# Altium PCB ATMEGA8高仿PLC控制板.PCBDOC (part 2 of 3)
Units mm, origin at the board's own origin, x right, y up, seen from the top; angles counter-clockwise.
Board outline 152.4 x 101.6 mm, 2 copper layers (Top Layer, Bottom Layer); 72 components, 81 nets, 279 pads, 77 vias.
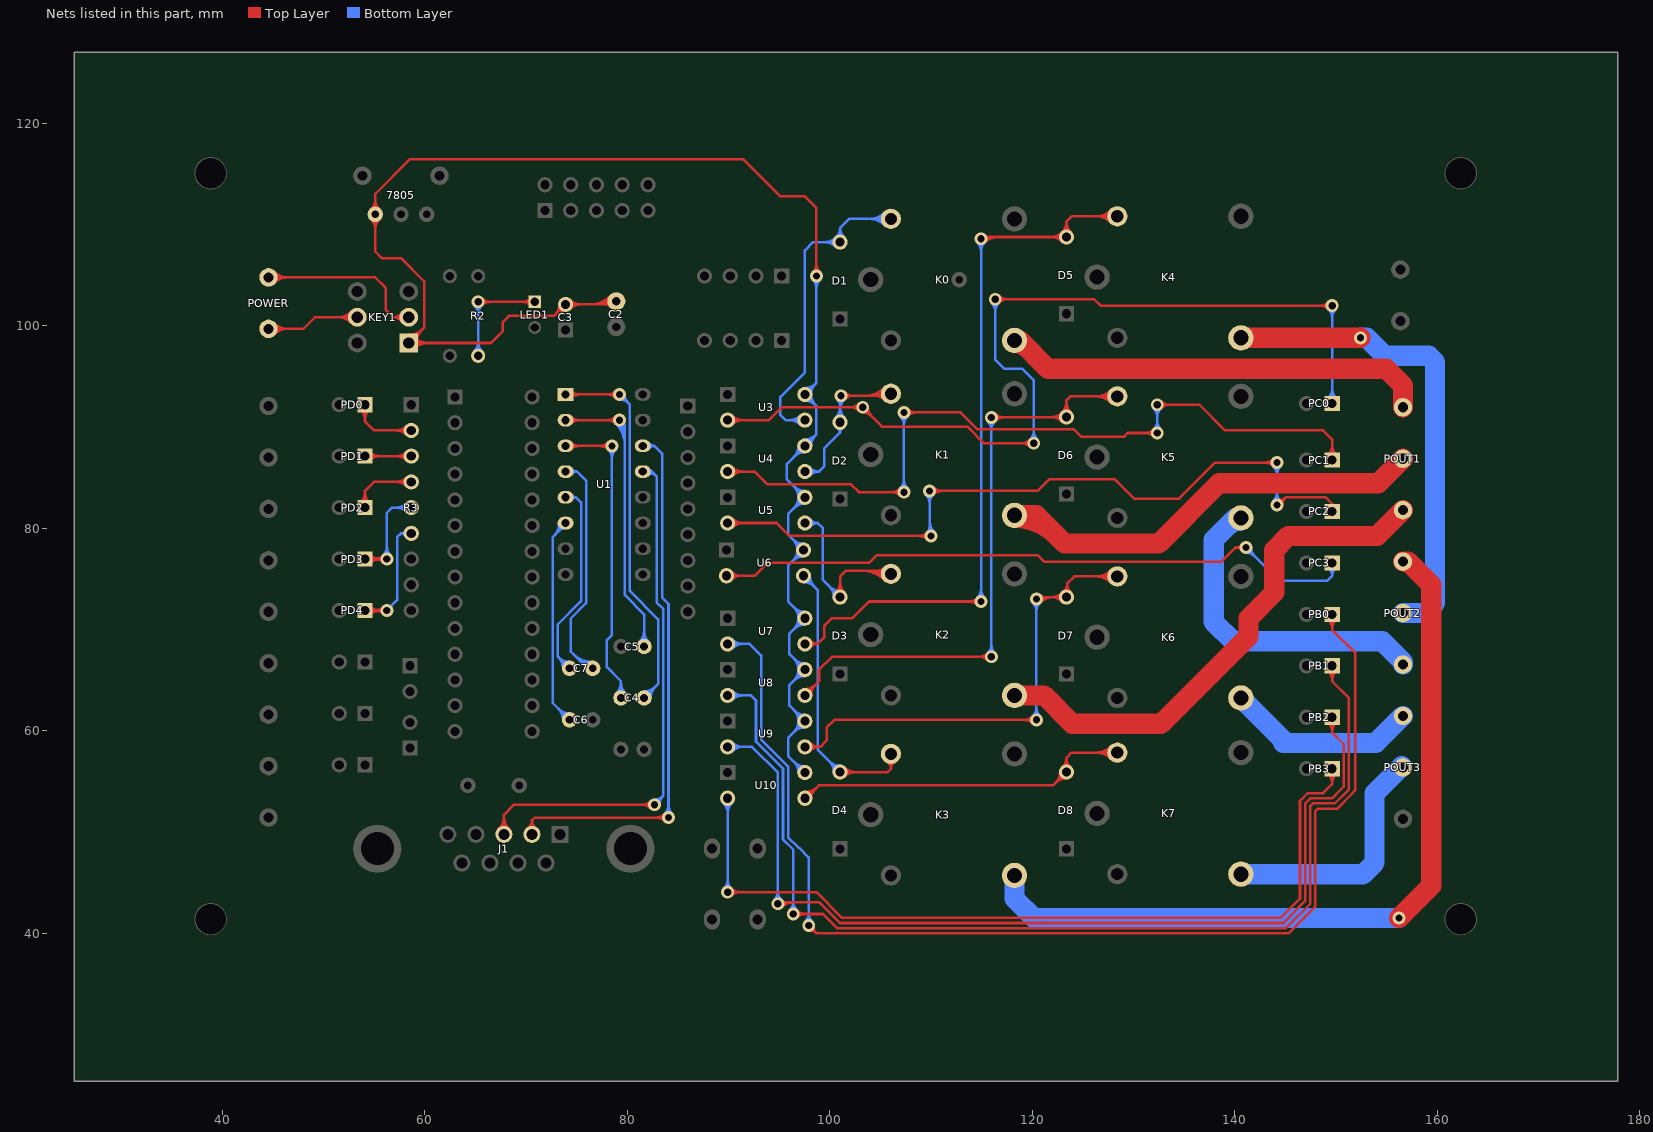
[diagram p2: the nets of this part, all layers, seen from the top]

## Via types
v1: diameter 1.27, hole 0.711, Top Layer to Bottom Layer, 77 vias

## Nets (pads, with @x,y where several pads share a name; then routed paths per layer and width w, separated by ;. In a path a pad name is that pad's centre, name@x,y a point inside that pad or via, vN(x,y) a via of type N, cw(c..) or ccw(c..) an arc to the next point about the centre after c; other vN are vias at no path point) (continued)
Net7805_1: 7805.1 C2.1 C3.2 KEY1.3 U3.4 U4.4 U5.4 U6.4 U7.4 U8.4 U9.4 U10.4 | length 246
  Top Layer w0.254: 7805.1@54.669,110.549 cw(c53.585,109.465) 55.118,109.465 cw(c56.651,109.465) 7805.1@55.567,110.549 ; 7805.1@54.669,111.447 ccw(c53.585,112.531) 55.118,112.531 ccw(c56.651,112.531) 7805.1@55.567,111.447 ; 7805.1@54.849,110.729 cw(c54.198,110.078) 55.118,110.078 cw(c56.038,110.078) 7805.1@55.387,110.729 ; 7805.1@54.849,111.267 ccw(c54.198,111.918) 55.118,111.918 ccw(c56.038,111.918) 7805.1@55.387,111.267 ; KEY1.3@58.42,98.842 ccw(c58.42,100.155) 59.349,99.227 ccw(c60.277,98.298) KEY1.3@58.964,98.298 ; KEY1.3@58.42,99.096 ccw(c58.42,101.023) 59.782,99.66 ccw(c61.145,98.298) KEY1.3@59.218,98.298 ; KEY1.3@58.805,97.913 cw(c59.733,96.985) 59.733,98.298 cw(c59.733,99.611) KEY1.3@58.805,98.683 ; KEY1.3@58.984,97.734 cw(c60.347,96.371) 60.347,98.298 cw(c60.347,100.225) KEY1.3@58.984,98.862 ; C3.2@73.291,102.108 cw(c71.787,102.108) 72.85,101.044 cw(c73.914,99.981) C3.2@73.914,101.485 ; C3.2@73.545,102.108 cw(c72.654,102.108) 73.284,101.478 cw(c73.914,100.848) C3.2@73.914,101.739 ; C3.2@74.175,101.847 cw(c74.805,101.217) 74.805,102.108 cw(c74.805,102.999) C3.2@74.175,102.369 ; C3.2@74.355,101.667 cw(c75.418,100.604) 75.418,102.108 cw(c75.418,103.612) C3.2@74.355,102.549 ; 76.316,102.108 ccw(c76.316,105.015) C2.1@78.371,102.959 ; 76.929,102.108 ccw(c76.929,104.402) C2.1@78.551,102.78 ; 77.542,102.108 ccw(c77.542,103.788) C2.1@78.73,102.6 ; 77.787,102.108 cw(c77.787,101.282) C2.1@78.371,101.866 ; C2.1@78.918,102.413 78.613,102.108 C3.2@73.914,102.108 72.771,100.965 68.326,100.965 67.691,100.33 67.691,99.441 66.548,98.298 KEY1.3@58.42,98.298 59.944,99.822 59.944,104.394 57.658,106.68 55.753,106.68 55.118,107.315 55.118,113.03 58.547,116.459 91.44,116.459 95.123,112.776 97.536,112.776 98.679,111.633 v1(98.679,104.902) ; v1@98.32,105.261 ccw(c97.453,106.128) 98.679,106.128 ccw(c99.905,106.128) v1@99.038,105.261
  Bottom Layer w0.254: U7.4@96.901,71.12 U7.4@97.536,71.12 ; U10.4@96.913,55.88 ccw(c95.409,55.88) 96.472,56.944 ccw(c97.536,58.007) U10.4@97.536,56.503 ; U4.4@96.913,88.138 cw(c95.409,88.138) 96.472,87.074 cw(c97.536,86.011) U4.4@97.536,87.515 ; U10.4@97.167,55.88 ccw(c96.276,55.88) 96.906,56.51 ccw(c97.536,57.14) U10.4@97.536,56.249 ; U4.4@97.167,88.138 cw(c96.276,88.138) 96.906,87.508 cw(c97.536,86.878) U4.4@97.536,87.769 ; U5.4@97.238,83.058 U5.4@97.536,83.058 ; U6.4@97.409,77.228 ccw(c97.409,75.724) 96.345,76.787 ccw(c95.282,77.851) 96.786,77.851 ccw(c95.282,77.851) 96.345,78.915 ccw(c97.409,79.978) U6.4@97.409,78.474 ; U6.4@97.409,77.482 ccw(c97.409,76.591) 96.779,77.221 ccw(c96.149,77.851) 97.04,77.851 ccw(c96.149,77.851) 96.779,78.481 ccw(c97.409,79.111) U6.4@97.409,78.22 ; U10.4@97.536,55.88 95.885,57.531 95.885,59.309 U9.4@97.536,60.96 96.012,62.484 96.012,64.516 U8.4@97.536,66.04 96.012,67.564 96.012,69.596 U7.4@97.536,71.12 ; U9.4@97.536,60.337 ccw(c97.536,58.833) 96.472,59.896 ccw(c95.409,60.96) 96.913,60.96 ccw(c95.409,60.96) 96.472,62.024 ccw(c97.536,63.087) U9.4@97.536,61.583 ; U9.4@97.536,60.591 ccw(c97.536,59.7) 96.906,60.33 ccw(c96.276,60.96) 97.167,60.96 ccw(c96.276,60.96) 96.906,61.59 ccw(c97.536,62.22) U9.4@97.536,61.329 ; U8.4@97.536,65.417 ccw(c97.536,63.913) 96.472,64.976 ccw(c95.409,66.04) 96.913,66.04 ccw(c95.409,66.04) 96.472,67.104 ccw(c97.536,68.167) U8.4@97.536,66.663 ; U8.4@97.536,65.671 ccw(c97.536,64.78) 96.906,65.41 ccw(c96.276,66.04) 97.167,66.04 ccw(c96.276,66.04) 96.906,66.67 ccw(c97.536,67.3) U8.4@97.536,66.409 ; U7.4@97.536,70.497 ccw(c97.536,68.993) 96.472,70.056 ccw(c95.409,71.12) 96.913,71.12 ccw(c95.409,71.12) 96.472,72.184 ccw(c97.536,73.247) U7.4@97.536,71.743 ; U7.4@97.536,70.751 ccw(c97.536,69.86) 96.906,70.49 ccw(c96.276,71.12) 97.167,71.12 ccw(c96.276,71.12) 96.906,71.75 ccw(c97.536,72.38) U7.4@97.536,71.489 ; U5.4@97.536,82.435 ccw(c97.536,80.931) 96.472,81.994 ccw(c95.409,83.058) 96.913,83.058 ccw(c95.409,83.058) 96.472,84.122 ccw(c97.536,85.185) U5.4@97.536,83.681 ; U5.4@97.536,82.689 ccw(c97.536,81.798) 96.906,82.428 ccw(c96.276,83.058) 97.167,83.058 ccw(c96.276,83.058) 96.906,83.688 ccw(c97.536,84.318) U5.4@97.536,83.427 ; U4.4@97.536,88.507 ccw(c97.536,89.398) 98.166,88.768 ccw(c98.796,88.138) U4.4@97.905,88.138 ; U4.4@97.536,88.761 ccw(c97.536,90.265) 98.6,89.202 ccw(c99.663,88.138) U4.4@98.159,88.138 ; U3.4@97.536,92.595 cw(c97.536,91.091) 98.6,92.154 cw(c99.663,93.218) 98.159,93.218 cw(c99.663,93.218) 98.6,94.282 cw(c97.536,95.345) U3.4@97.536,93.841 ; U3.4@97.536,92.849 cw(c97.536,91.958) 98.166,92.588 cw(c98.796,93.218) 97.905,93.218 cw(c98.796,93.218) 98.166,93.848 cw(c97.536,94.478) U3.4@97.536,93.587 ; v1@98.32,104.543 cw(c97.453,103.676) 98.679,103.676 cw(c99.905,103.676) v1@99.038,104.543 ; v1(98.679,104.902) 98.679,94.361 U3.4@97.536,93.218 98.679,92.075 98.679,89.281 95.758,86.36 95.758,84.836 U5.4@97.536,83.058 ; U7.4@97.536,71.12 95.885,72.771 95.885,76.327 U6.4@97.409,77.851 95.885,79.375 95.885,81.407 U5.4@97.536,83.058
NetC4_1: C4.1 U1.1 | length 47.1
  Top Layer w0.254: U1.1@73.91,93.217 v1(79.249,93.217) ; U1.1@74.425,92.865 cw(c75.275,92.015) 75.275,93.217 cw(c75.275,94.419) U1.1@74.425,93.569 ; v1@78.89,92.858 ccw(c78.023,91.991) 78.023,93.217 ccw(c78.023,94.443) v1@78.89,93.576
  Bottom Layer w0.254: v1@79.249,92.709 cw(c79.249,91.483) 80.116,92.35 cw(c80.983,93.217) v1@79.757,93.217 ; v1(79.249,93.217) 80.264,92.202 80.264,73.787 83.058,70.993 83.058,64.643 C4.1@81.661,63.246 ; C4.1@81.661,63.627 ccw(c81.661,64.547) 82.311,63.896 ccw(c82.962,63.246) C4.1@82.042,63.246 ; C4.1@81.661,63.881 ccw(c81.661,65.414) 82.745,64.33 ccw(c83.829,63.246) C4.1@82.296,63.246
NetC4_2: C4.2 U1.3 | length 39.8
  Top Layer w0.254: U1.3@73.91,88.137 v1(78.485,88.137) ; U1.3@74.425,87.785 cw(c75.275,86.935) 75.275,88.137 cw(c75.275,89.339) U1.3@74.425,88.489 ; v1@78.126,87.778 ccw(c77.259,86.911) 77.259,88.137 ccw(c77.259,89.363) v1@78.126,88.496
  Bottom Layer w0.254: v1@78.126,87.778 cw(c77.256,86.908) 78.486,86.908 ; v1(78.485,88.137) 78.486,88.136 78.486,69.469 77.978,68.961 77.978,66.294 79.375,64.897 C4.2@79.375,63.246 ; 78.486,86.913 cw(c79.709,86.913) v1@78.844,87.778 ; C4.2@78.926,63.695 ccw(c77.842,64.779) 79.375,64.779 ccw(c80.908,64.779) C4.2@79.824,63.695 ; C4.2@79.106,63.515 ccw(c78.455,64.166) 79.375,64.166 ccw(c80.295,64.166) C4.2@79.644,63.515
NetC5_1: C5.1 U1.2 | length 43.4
  Top Layer w0.254: U1.2@73.91,90.677 v1(79.247,90.677) ; U1.2@74.425,90.325 cw(c75.275,89.475) 75.275,90.677 cw(c75.275,91.879) U1.2@74.425,91.029 ; v1@78.888,90.318 ccw(c78.021,89.451) 78.021,90.677 ccw(c78.021,91.903) v1@78.888,91.036
  Bottom Layer w0.254: v1@78.888,90.318 cw(c76.792,88.222) 79.756,88.222 ; v1@79.067,90.497 cw(c77.405,88.835) 79.756,88.835 ; v1@79.427,90.857 cw(c78.631,90.061) 79.756,90.061 ; v1@79.465,90.218 cw(c79.575,89.987) 79.756,90.168 ; v1@79.706,90.459 ccw(c79.937,90.349) 79.756,90.168 ; 79.756,89.448 ccw(c78.018,89.448) v1(79.247,90.677) 79.756,90.168 ; C5.1@81.212,68.775 ccw(c80.128,69.859) 81.661,69.859 ccw(c83.194,69.859) C5.1@82.11,68.775 ; C5.1@81.392,68.595 ccw(c80.741,69.246) 81.661,69.246 ccw(c82.581,69.246) C5.1@81.93,68.595 ; C5.1@81.661,68.326 81.661,71.501 79.756,73.406 79.756,90.168
NetC6_2: C6.2 U1.6 | length 27.3
  Bottom Layer w0.254: 72.791,79.266 ccw(c71.674,80.384) U1.6@73.251,80.485 ; 73.188,79.663 ccw(c72.42,80.432) U1.6@73.504,80.501 ; 73.4,79.875 cw(c73.748,79.527) U1.6@73.748,80.019 ; C6.2@73.66,61.087 ccw(c72.127,61.087) 73.211,62.171 ccw(c74.295,63.255) C6.2@74.295,61.722 ; U1.6@73.91,80.517 74.042,80.517 72.644,79.119 72.644,62.738 C6.2@74.295,61.087 ; C6.2@73.914,61.087 ccw(c72.994,61.087) 73.645,61.737 ccw(c74.295,62.388) C6.2@74.295,61.468
NetC7_1: C7.1 U1.4 | length 29
  Bottom Layer w0.254: U1.4@73.91,85.597 75.058,85.597 ; U1.4@74.474,85.302 cw(c75.058,84.871) 75.058,85.597 ; U1.4@74.474,85.892 ccw(c75.058,86.323) 75.058,85.597 ; 74.676,67.564 ccw(c76.517,69.405) C7.1@76.568,66.802 ; 75.098,67.142 ccw(c76.533,68.578) C7.1@76.573,66.548 ; 75.52,66.72 ccw(c76.55,67.75) C7.1@76.578,66.294 ; C7.1@76.581,66.167 76.073,66.167 74.422,67.818 74.422,71.076 75.946,72.6 75.946,84.709 75.058,85.597
NetC7_2: C7.2 U1.5 | length 24.4
  Bottom Layer w0.254: C7.2@73.66,66.167 ccw(c72.127,66.167) 73.211,67.251 ccw(c74.295,68.335) C7.2@74.295,66.802 ; U1.5@73.91,83.057 74.931,83.057 ; C7.2@73.914,66.167 ccw(c72.994,66.167) 73.645,66.817 ccw(c74.295,67.468) C7.2@74.295,66.548 ; C7.2@74.295,66.167 73.152,67.31 73.152,70.525 75.438,72.811 75.438,82.55 74.931,83.057 ; U1.5@74.505,82.81 cw(c74.931,82.566) 74.931,83.057 ; U1.5@74.505,83.304 ccw(c74.931,83.548) 74.931,83.057
NetD1_2: D1.2 K0.4 U3.3 | length 47
  Bottom Layer w0.254: U3.3@97.095,90.237 ccw(c96.032,89.174) 96.032,90.678 ccw(c96.032,92.182) U3.3@97.095,91.119 ; U3.3@97.275,90.417 ccw(c96.645,89.787) 96.645,90.678 ccw(c96.645,91.569) U3.3@97.275,90.939 ; U3.3@97.536,90.678 95.631,90.678 95.123,91.186 95.123,92.964 97.536,95.377 97.536,107.442 98.346,108.252 D1.2@101.016,108.252 101.016,109.652 ; D1.2@100.576,107.812 ccw(c99.512,106.748) 99.512,108.252 ccw(c99.512,109.756) D1.2@100.576,108.693 ; D1.2@100.599,108.715 ccw(c99.755,109.652) 101.016,109.652 ; D1.2@100.755,107.991 ccw(c100.125,107.361) 100.125,108.252 ccw(c100.125,109.143) D1.2@100.755,108.513 ; D1.2@100.769,108.526 ccw(c100.269,109.081) 101.016,109.081 ccw(c101.764,109.081) D1.2@101.263,108.526 ; D1.2@101.433,108.715 cw(c102.278,109.652) 101.016,109.652 ; K0.4@105.42,109.935 ccw(c103.929,108.444) 103.929,110.552 ccw(c103.929,112.66) K0.4@105.42,111.169 ; K0.4@105.599,110.114 ccw(c104.543,109.058) 104.543,110.552 ccw(c104.543,112.046) K0.4@105.599,110.99 ; K0.4@106.037,110.552 101.916,110.552 101.016,109.652
NetD2_2: D2.2 K1.4 U4.3 | length 34.4
  Top Layer w0.254: v1(101.092,93.091) 105.848,93.091 K1.4@106.037,93.28 ; v1@101.451,92.732 cw(c102.318,91.865) 102.318,93.091 cw(c102.318,94.317) v1@101.451,93.45 ; 103.473,93.091 ccw(c103.473,95.844) K1.4@105.42,93.897 ; 104.086,93.091 ccw(c104.086,95.231) K1.4@105.599,93.718 ; 104.386,93.091 cw(c104.386,91.629) K1.4@105.42,92.663 ; 104.7,93.091 ccw(c104.7,94.617) K1.4@105.779,93.538 ; 104.999,93.091 cw(c104.999,92.242) K1.4@105.599,92.842
  Bottom Layer w0.254: U4.3@97.536,85.598 98.933,85.598 ; U4.3@97.811,85.351 cw(c98.363,84.855) 98.363,85.598 cw(c98.363,86.341) U4.3@97.811,85.845 ; U4.3@98,85.182 cw(c98.933,84.343) 98.933,85.598 ; U4.3@98,86.014 ccw(c98.933,86.853) 98.933,85.598 ; D2.2@100.576,90.913 ccw(c99.512,91.976) 101.016,91.976 ccw(c102.52,91.976) D2.2@101.457,90.913 ; v1@100.733,92.732 cw(c100.048,92.047) 101.016,92.047 ; D2.2@100.735,89.916 cw(c100.504,89.459) 101.016,89.459 ; D2.2@100.755,90.733 ccw(c100.125,91.363) 101.016,91.363 ccw(c101.907,91.363) D2.2@101.277,90.733 ; 101.016,91.682 cw(c102.501,91.682) v1@101.451,92.732 ; 101.016,92.295 cw(c101.888,92.295) v1@101.272,92.911 ; v1(101.092,93.091) 101.016,93.015 101.016,89.459 ; D2.2@101.297,89.916 ccw(c101.528,89.459) 101.016,89.459 ; 98.933,85.598 99.441,86.106 99.441,87.884 101.016,89.459
NetD3_2: D3.2 K2.4 U5.3 | length 35.3
  Top Layer w0.254: D3.2@100.576,73.641 ccw(c99.512,74.704) 101.016,74.704 ccw(c102.52,74.704) D3.2@101.457,73.641 ; D3.2@100.755,73.461 ccw(c100.125,74.091) 101.016,74.091 ccw(c101.907,74.091) D3.2@101.277,73.461 ; D3.2@101.016,73.2 101.016,75.235 101.6,75.819 105.718,75.819 K2.4@106.037,75.5 ; 103.159,75.819 cw(c103.159,72.622) K2.4@105.42,74.883 ; 103.772,75.819 cw(c103.772,73.235) K2.4@105.599,75.062 ; 104.386,75.819 cw(c104.386,73.849) K2.4@105.779,75.242 ; 104.7,75.819 ccw(c104.7,76.837) K2.4@105.42,76.117 ; 104.999,75.819 cw(c104.999,74.462) K2.4@105.959,75.421
  Bottom Layer w0.254: U5.3@97.536,80.518 98.806,80.518 ; U5.3@97.828,80.292 cw(c98.288,79.936) 98.288,80.518 cw(c98.288,81.1) U5.3@97.828,80.744 ; U5.3@98.029,80.137 cw(c98.806,79.535) 98.806,80.518 ; U5.3@98.029,80.899 ccw(c98.806,81.501) 98.806,80.518 ; D3.2@100.393,73.2 ccw(c98.889,73.2) 99.953,74.264 ccw(c101.016,75.327) D3.2@101.016,73.823 ; D3.2@100.647,73.2 ccw(c99.756,73.2) 100.386,73.83 ccw(c101.016,74.46) D3.2@101.016,73.569 ; D3.2@101.016,73.2 99.314,74.903 99.314,80.01 98.806,80.518
NetD4_2: D4.2 K3.4 U6.3 | length 41.7
  Top Layer w0.254: D4.2@101.016,55.928 105.712,55.928 106.037,56.253 ; D4.2@101.277,55.667 cw(c101.907,55.037) 101.907,55.928 cw(c101.907,56.819) D4.2@101.277,56.189 ; D4.2@101.457,55.488 cw(c102.52,54.424) 102.52,55.928 cw(c102.52,57.432) D4.2@101.457,56.369 ; K3.4@105.621,56.953 cw(c105.241,56.253) 106.037,56.253 ; K3.4@105.742,57.176 cw(c105.473,56.68) 106.037,56.68 cw(c106.601,56.68) K3.4@106.332,57.176 ; K3.4@106.037,57.72 106.037,56.253 ; K3.4@106.453,56.953 ccw(c106.833,56.253) 106.037,56.253
  Bottom Layer w0.254: U6.3@97.409,74.688 cw(c97.409,73.184) 98.473,74.247 cw(c99.536,75.311) U6.3@98.032,75.311 ; U6.3@97.409,74.942 cw(c97.409,74.051) 98.039,74.681 cw(c98.669,75.311) U6.3@97.778,75.311 ; U6.3@97.409,75.311 98.806,73.914 98.806,58.139 D4.2@101.016,55.928 ; D4.2@100.393,55.928 ccw(c98.889,55.928) 99.953,56.992 ccw(c101.016,58.055) D4.2@101.016,56.551 ; D4.2@100.647,55.928 ccw(c99.756,55.928) 100.386,56.558 ccw(c101.016,57.188) D4.2@101.016,56.297
NetD5_2: D5.2 K4.4 U7.3 | length 95.6
  Top Layer w0.254: U7.3@97.536,68.58 98.806,68.58 ; U7.3@97.828,68.354 cw(c98.288,67.998) 98.288,68.58 cw(c98.288,69.162) U7.3@97.828,68.806 ; U7.3@98.029,68.199 cw(c98.806,67.597) 98.806,68.58 ; U7.3@98.029,68.961 ccw(c98.806,69.563) 98.806,68.58 ; v1@114.576,72.412 ccw(c113.709,71.545) 113.709,72.771 ccw(c113.709,73.997) v1@114.576,73.13 ; v1(114.935,72.771) 103.886,72.771 102.235,71.12 100.203,71.12 99.441,70.358 99.441,69.215 98.806,68.58 ; v1(114.935,108.585) 115.11,108.76 D5.2@123.368,108.76 123.368,110.287 123.887,110.806 K4.4@128.389,110.806 ; v1@115.115,108.405 cw(c115.971,107.549) 115.971,108.76 ; v1@115.294,108.226 cw(c116.584,106.936) 116.584,108.76 ; v1@115.294,108.944 ccw(c115.738,109.388) 115.738,108.76 ; D5.2@122.928,108.32 ccw(c121.864,107.256) 121.864,108.76 ccw(c121.864,110.264) 122.928,109.201 ccw(c121.864,110.264) 123.368,110.264 ccw(c124.872,110.264) D5.2@123.809,109.201 ; D5.2@123.107,108.499 ccw(c122.477,107.869) 122.477,108.76 ccw(c122.477,109.651) 123.107,109.021 ccw(c122.477,109.651) 123.368,109.651 ccw(c124.259,109.651) D5.2@123.629,109.021 ; K4.4@127.772,110.189 ccw(c126.281,108.698) 126.281,110.806 ccw(c126.281,112.914) K4.4@127.772,111.423 ; K4.4@127.951,110.368 ccw(c126.895,109.312) 126.895,110.806 ccw(c126.895,112.3) K4.4@127.951,111.244
  Bottom Layer w0.254: v1@114.576,73.13 ccw(c113.709,73.997) 114.935,73.997 ccw(c116.161,73.997) v1@115.294,73.13 ; v1@114.576,108.226 cw(c113.709,107.359) 114.935,107.359 cw(c116.161,107.359) v1@115.294,108.226 ; v1(114.935,72.771) v1(114.935,108.585)
NetD6_2: D6.2 K5.4 U8.3 | length 83.8
  Top Layer w0.254: U8.3@97.536,63.5 98.933,64.897 98.933,66.04 100.203,67.31 v1(115.951,67.31) ; U8.3@97.536,63.869 ccw(c97.536,64.76) 98.166,64.13 ccw(c98.796,63.5) U8.3@97.905,63.5 ; U8.3@97.536,64.123 ccw(c97.536,65.627) 98.6,64.564 ccw(c99.663,63.5) U8.3@98.159,63.5 ; v1@115.592,66.951 ccw(c114.725,66.084) 114.725,67.31 ccw(c114.725,68.536) v1@115.592,67.669 ; v1(115.951,90.932) 115.999,90.98 D6.2@123.368,90.98 123.368,92.634 123.76,93.026 K5.4@128.389,93.026 ; v1@116.131,90.752 cw(c116.681,90.202) 116.681,90.98 ; v1@116.31,90.573 cw(c117.294,89.589) 117.294,90.98 ; v1@116.31,91.291 ccw(c117.061,92.042) 117.061,90.98 ; D6.2@122.928,90.54 ccw(c121.864,89.476) 121.864,90.98 ccw(c121.864,92.484) 122.928,91.421 ccw(c121.864,92.484) 123.368,92.484 ccw(c124.872,92.484) D6.2@123.809,91.421 ; D6.2@123.107,90.719 ccw(c122.477,90.089) 122.477,90.98 ccw(c122.477,91.871) 123.107,91.241 ccw(c122.477,91.871) 123.368,91.871 ccw(c124.259,91.871) D6.2@123.629,91.241 ; K5.4@127.772,92.409 ccw(c126.281,90.918) 126.281,93.026 ccw(c126.281,95.134) K5.4@127.772,93.643 ; K5.4@127.951,92.588 ccw(c126.895,91.532) 126.895,93.026 ccw(c126.895,94.52) K5.4@127.951,93.464
  Bottom Layer w0.254: v1@115.592,67.669 ccw(c114.725,68.536) 115.951,68.536 ccw(c117.177,68.536) v1@116.31,67.669 ; v1@115.592,90.573 cw(c114.725,89.706) 115.951,89.706 cw(c117.177,89.706) v1@116.31,90.573 ; v1(115.951,67.31) v1(115.951,90.932)
NetD7_2: D7.2 K6.4 U9.3 | length 70.9
  Top Layer w0.254: U9.3@97.536,58.42 99.06,58.42 99.695,59.055 99.695,60.325 100.457,61.087 v1(120.396,61.087) v1@120.269,60.96 ; U9.3@97.797,58.159 cw(c98.427,57.529) 98.427,58.42 cw(c98.427,59.311) U9.3@97.797,58.681 ; U9.3@97.977,57.979 cw(c99.04,56.916) 99.04,58.42 cw(c99.04,59.924) U9.3@97.977,58.861 ; v1@120.037,60.728 ccw(c119.17,59.861) 119.17,61.087 ccw(c119.17,62.313) v1@120.037,61.446 ; v1(120.396,73.025) 120.571,73.2 D7.2@123.368,73.2 123.444,73.276 123.444,74.549 ; v1@120.576,72.845 cw(c121.432,71.989) 121.432,73.2 ; v1@120.755,72.666 cw(c122.045,71.376) 122.045,73.2 ; v1@120.755,73.384 ccw(c121.199,73.828) 121.199,73.2 ; D7.2@122.928,72.76 ccw(c121.864,71.696) 121.864,73.2 ccw(c121.864,74.704) D7.2@122.928,73.641 ; D7.2@123.009,73.709 ccw(c122.416,74.549) 123.444,74.549 ; D7.2@123.107,72.939 ccw(c122.477,72.309) 122.477,73.2 ccw(c122.477,74.091) D7.2@123.107,73.461 ; D7.2@123.155,73.502 ccw(c122.762,74.059) 123.444,74.059 ; 123.444,74.522 ccw(c124.69,74.522) D7.2@123.809,73.641 ; K6.4@127.772,74.629 ccw(c126.281,73.138) 126.281,75.246 ccw(c126.281,77.354) K6.4@127.772,75.863 ; K6.4@127.951,74.808 ccw(c126.895,73.752) 126.895,75.246 ccw(c126.895,76.74) K6.4@127.951,75.684 ; K6.4@128.389,75.246 124.141,75.246 123.444,74.549
  Bottom Layer w0.254: v1@120.037,61.446 ccw(c119.17,62.313) 120.396,62.313 ccw(c121.622,62.313) v1@120.755,61.446 ; v1@120.037,72.666 cw(c119.17,71.799) 120.396,71.799 cw(c121.622,71.799) v1@120.755,72.666 ; v1(120.396,61.087) v1(120.396,73.025)
NetD8_2: D8.2 K7.4 U10.3 | length 49.6
  Top Layer w0.254: U10.3@97.536,53.34 97.663,53.34 98.933,54.61 122.05,54.61 D8.2@123.368,55.928 123.368,57.328 ; U10.3@97.536,53.709 ccw(c97.536,54.906) 98.383,54.06 ; U10.3@97.536,53.963 ccw(c97.536,55.774) 98.816,54.493 ; U10.3@98.159,53.34 cw(c99.356,53.34) 98.51,54.187 ; D8.2@122.745,55.928 cw(c121.241,55.928) 122.305,54.865 cw(c123.368,53.801) D8.2@123.368,55.305 ; D8.2@122.951,56.391 ccw(c122.107,57.328) 123.368,57.328 ; D8.2@122.999,55.928 cw(c122.108,55.928) 122.738,55.298 cw(c123.368,54.668) D8.2@123.368,55.559 ; D8.2@123.121,56.202 ccw(c122.621,56.757) 123.368,56.757 ccw(c124.116,56.757) D8.2@123.615,56.202 ; D8.2@123.785,56.391 cw(c124.63,57.328) 123.368,57.328 ; K7.4@127.772,57.23 ccw(c126.281,55.739) 126.281,57.847 ccw(c126.281,59.955) K7.4@127.772,58.464 ; K7.4@127.951,57.409 ccw(c126.895,56.353) 126.895,57.847 ccw(c126.895,59.341) K7.4@127.951,58.285 ; K7.4@128.389,57.847 123.887,57.847 123.368,57.328
NetJ1_2: J1.2 U1.14 | length 61.6
  Top Layer w0.254: J1.2@70.178,50.371 ccw(c69.631,51.157) 70.588,51.157 ; J1.2@70.323,50.163 ccw(c69.969,50.671) 70.588,50.671 ccw(c71.207,50.671) J1.2@70.853,50.163 ; J1.2@70.588,49.782 70.588,51.157 ; J1.2@70.998,50.371 cw(c71.546,51.157) 70.588,51.157 ; v1@83.715,51.076 ccw(c82.848,50.209) 82.848,51.435 ccw(c82.848,52.661) v1@83.715,51.794 ; v1(84.074,51.435) 70.866,51.435 70.588,51.157
  Bottom Layer w0.254: U1.14@81.53,88.137 82.678,88.137 ; U1.14@82.094,87.842 cw(c82.678,87.411) 82.678,88.137 ; U1.14@82.094,88.432 ccw(c82.678,88.863) 82.678,88.137 ; v1@83.715,51.794 ccw(c82.848,52.661) 84.074,52.661 ccw(c85.3,52.661) v1@84.433,51.794 ; v1(84.074,51.435) 84.074,72.517 83.439,73.152 83.439,87.376 82.678,88.137
NetJ1_3: J1.3 U1.13 | length 63.3
  Top Layer w0.254: J1.3@67.31,50.29 ccw(c66.085,51.515) 67.818,51.515 ccw(c69.551,51.515) J1.3@68.326,50.29 ; J1.3@67.49,50.11 ccw(c66.698,50.902) 67.818,50.902 ccw(c68.938,50.902) J1.3@68.146,50.11 ; J1.3@67.818,49.782 67.818,51.689 68.834,52.705 v1(82.677,52.705) ; v1@82.318,52.346 ccw(c81.451,51.479) 81.451,52.705 ccw(c81.451,53.931) v1@82.318,53.064
  Bottom Layer w0.254: U1.13@81.53,85.597 82.424,85.597 ; U1.13@81.686,85.604 cw(c82.051,85.225) 82.424,85.597 ; U1.13@81.862,85.421 cw(c82.231,85.038) 82.607,85.414 ; U1.13@82.038,85.238 cw(c82.41,84.852) 82.79,85.231 ; U1.13@82.156,85.415 cw(c82.424,85.309) 82.424,85.597 ; U1.13@82.156,85.78 ccw(c82.424,85.885) 82.424,85.597 ; v1(82.677,52.705) 83.566,53.594 83.566,72.009 82.931,72.644 82.931,85.09 82.424,85.597 ; v1@82.677,53.213 ccw(c82.677,54.439) 83.544,53.572 ccw(c84.411,52.705) v1@83.185,52.705
NetK0_1: K0.1 POUT1.1 | length 43.8
  Top Layer w2: K0.1@118.237,98.302 cw(c118.237,96.472) 119.531,97.766 ; K0.1@118.237,98.552 118.745,98.552 121.539,95.758 154.94,95.758 156.591,94.107 POUT1.1@156.591,91.948
NetK1_1: K1.1 POUT1.2 | length 51
  Top Layer w2: K1.1@118.237,81.03 cw(c118.237,75.214) 122.349,79.327 ; K1.1@118.237,81.28 120.396,81.28 123.19,78.486 132.461,78.486 138.43,84.455 154.178,84.455 POUT1.2@156.591,86.868 ; K1.1@118.303,81.039 cw(c119.169,77.894) 121.475,80.201
NetK2_1: K2.1 POUT1.3 | length 51.7
  Top Layer w2: K2.1@118.237,63.5 121.158,63.5 123.952,60.706 132.715,60.706 141.351,69.342 141.351,71.12 143.891,73.66 143.891,77.851 145.288,79.248 154.051,79.248 POUT1.3@156.591,81.788
NetK3_1: K3.1 POUT2.1 | length 79
  Top Layer w2: v1(156.21,41.529) 159.385,44.704 159.385,74.422 157.099,76.708 POUT2.1@156.591,76.708
  Bottom Layer w2: K3.1@118.237,45.72 118.237,43.434 120.142,41.529 v1(156.21,41.529)
NetK4_1: K4.1 POUT2.2 | length 47.5
  Top Layer w2: K4.1@140.589,98.806 v1(152.4,98.806)
  Bottom Layer w2: v1(152.4,98.806) 153.035,98.806 154.813,97.028 159.131,97.028 159.766,96.393 159.766,72.644 158.75,71.628 POUT2.2@156.591,71.628
NetK5_1: K5.1 POUT2.3 | length 33.7
  Bottom Layer w2: 139.295,80.24 cw(c140.589,78.946) K5.1@140.589,80.776 ; K5.1@140.589,81.026 140.081,81.026 137.922,78.867 137.922,70.739 139.827,68.834 154.559,68.834 156.591,66.802 POUT2.3@156.591,66.548
NetK6_1: K6.1 POUT3.1 | length 19.3
  Bottom Layer w2: K6.1@140.462,63.373 144.78,59.055 144.78,58.801 153.924,58.801 POUT3.1@156.591,61.468
NetK7_1: K7.1 POUT3.2 | length 24.3
  Bottom Layer w2: K7.1@140.589,45.847 152.654,45.847 153.797,46.99 153.797,53.848 POUT3.2@156.464,56.515
NetKEY1_1: KEY1.1 POWER.1 | length 25.2
  Top Layer w0.254: POWER.1@44.577,104.775 55.118,104.775 56.134,103.759 56.134,101.6 56.896,100.838 ; POWER.1@44.952,104.4 cw(c45.859,103.493) 45.859,104.775 cw(c45.859,106.057) POWER.1@44.952,105.15 ; POWER.1@45.132,104.22 cw(c46.472,102.88) 46.472,104.775 cw(c46.472,106.67) POWER.1@45.132,105.33 ; KEY1.1@57.764,100.383 ccw(c56.896,99.782) 56.896,100.838 ; KEY1.1@57.764,101.293 cw(c56.896,101.894) 56.896,100.838 ; KEY1.1@57.973,100.528 ccw(c57.381,100.118) 57.381,100.838 ccw(c57.381,101.558) KEY1.1@57.973,101.148 ; KEY1.1@58.42,100.838 56.896,100.838
NetKEY1_6: KEY1.5 POWER.2 | length 19.3
  Top Layer w0.254: POWER.2@44.577,99.695 48.006,99.695 49.149,100.838 KEY1.5@53.34,100.838 ; POWER.2@44.952,99.32 cw(c45.859,98.413) 45.859,99.695 cw(c45.859,100.977) POWER.2@44.952,100.07 ; POWER.2@45.132,99.14 cw(c46.472,97.8) 46.472,99.695 cw(c46.472,101.59) POWER.2@45.132,100.25 ; KEY1.5@52.776,100.274 ccw(c51.413,98.911) 51.413,100.838 ccw(c51.413,102.765) KEY1.5@52.776,101.402 ; KEY1.5@52.955,100.453 ccw(c52.027,99.525) 52.027,100.838 ccw(c52.027,102.151) KEY1.5@52.955,101.223
NetLED1_1: LED1.1 R2.2 | length 20.1
  Top Layer w0.254: v1(65.278,102.362) LED1.1@70.866,102.362 ; v1@65.637,102.003 cw(c66.504,101.136) 66.504,102.362 cw(c66.504,103.588) v1@65.637,102.721 ; LED1.1@70.507,102.003 ccw(c69.64,101.136) 69.64,102.362 ccw(c69.64,103.588) LED1.1@70.507,102.721
  Bottom Layer w0.254: R2.2@64.873,97.433 ccw(c63.895,98.411) 65.278,98.411 ccw(c66.661,98.411) R2.2@65.683,97.433 ; v1@64.919,102.003 cw(c64.052,101.136) 65.278,101.136 cw(c66.504,101.136) v1@65.637,102.003 ; R2.2@65.052,97.254 ccw(c64.508,97.798) 65.278,97.798 ccw(c66.048,97.798) R2.2@65.504,97.254 ; R2.2@65.278,97.028 v1(65.278,102.362)
NetPB0_1: PB0.1 U7.2 | length 127.4
  Top Layer w0.254: v1(97.917,40.767) 98.679,40.005 ; v1@97.966,40.261 cw(c98.05,39.376) 98.679,40.005 ; v1@98.423,40.718 ccw(c99.308,40.634) 98.679,40.005 ; PB0.1@149.165,71.06 cw(c148.102,69.997) 149.606,69.997 cw(c151.11,69.997) PB0.1@150.047,71.06 ; PB0.1@149.345,71.24 cw(c148.715,70.61) 149.606,70.61 cw(c150.497,70.61) PB0.1@149.867,71.24 ; PB0.1@149.606,71.501 149.606,69.977 151.892,67.691 151.892,54.146 151.638,53.892 151.638,53.848 150.114,52.324 148.209,52.324 147.955,52.07 147.955,42.672 145.288,40.005 98.679,40.005
  Bottom Layer w0.254: U7.2@89.916,68.58 92.075,68.58 93.218,67.437 93.218,59.138 95.885,56.471 95.885,49.486 96.901,48.47 96.945,48.47 97.917,47.498 v1(97.917,40.767) ; U7.2@90.177,68.319 cw(c90.807,67.689) 90.807,68.58 cw(c90.807,69.471) U7.2@90.177,68.841 ; U7.2@90.357,68.139 cw(c91.42,67.076) 91.42,68.58 cw(c91.42,70.084) U7.2@90.357,69.021 ; v1@97.558,41.126 ccw(c96.691,41.993) 97.917,41.993 ccw(c99.143,41.993) v1@98.276,41.126
NetPB1_1: PB1.1 U8.2 | length 116.6
  Top Layer w0.254: v1(96.393,41.91) 99.314,41.91 100.711,40.513 145.034,40.513 147.447,42.926 147.447,52.578 147.701,52.832 149.86,52.832 151.257,54.229 151.257,63.246 149.606,64.897 PB1.1@149.606,66.421 ; v1@96.752,41.551 cw(c97.619,40.684) 97.619,41.91 cw(c97.619,43.136) v1@96.752,42.269 ; PB1.1@149.165,65.98 cw(c148.102,64.917) 149.606,64.917 cw(c151.11,64.917) PB1.1@150.047,65.98 ; PB1.1@149.345,66.16 cw(c148.715,65.53) 149.606,65.53 cw(c150.497,65.53) PB1.1@149.867,66.16
  Bottom Layer w0.254: U8.2@89.916,63.5 92.202,63.5 92.71,62.992 92.71,58.928 95.377,56.261 95.377,49.276 96.393,48.26 v1(96.393,41.91) ; U8.2@90.177,63.239 cw(c90.807,62.609) 90.807,63.5 cw(c90.807,64.391) U8.2@90.177,63.761 ; U8.2@90.357,63.059 cw(c91.42,61.996) 91.42,63.5 cw(c91.42,65.004) U8.2@90.357,63.941 ; v1@96.034,42.269 ccw(c95.167,43.136) 96.393,43.136 ccw(c97.619,43.136) v1@96.752,42.269
NetPB2_1: PB2.1 U9.2 | length 106.5
  Top Layer w0.254: v1(94.869,42.926) 94.996,43.053 98.977,43.053 101.009,41.021 144.78,41.021 146.939,43.18 146.939,52.832 147.447,53.34 149.606,53.34 150.749,54.483 150.749,58.674 149.606,59.817 PB2.1@149.606,61.341 ; v1@95.049,42.746 cw(c95.789,42.006) 95.789,43.053 cw(c95.789,43.846) v1@95.228,43.285 ; v1@95.228,42.567 cw(c96.402,41.393) 96.402,43.053 ; PB2.1@149.165,60.9 cw(c148.102,59.837) 149.606,59.837 cw(c151.11,59.837) PB2.1@150.047,60.9 ; PB2.1@149.345,61.08 cw(c148.715,60.45) 149.606,60.45 cw(c150.497,60.45) PB2.1@149.867,61.08
  Bottom Layer w0.254: U9.2@89.916,58.42 92.329,58.42 94.869,55.88 v1(94.869,42.926) ; U9.2@90.177,58.159 cw(c90.807,57.529) 90.807,58.42 cw(c90.807,59.311) U9.2@90.177,58.681 ; U9.2@90.357,57.979 cw(c91.42,56.916) 91.42,58.42 cw(c91.42,59.924) U9.2@90.357,58.861 ; v1@94.51,43.285 ccw(c93.643,44.152) 94.869,44.152 ccw(c96.095,44.152) v1@95.228,43.285
NetPB3_1: PB3.1 U10.2 | length 94
  Top Layer w0.254: v1(89.916,44.069) 98.679,44.069 101.219,41.529 144.526,41.529 146.431,43.434 146.431,53.086 147.193,53.848 148.717,53.848 149.606,54.737 PB3.1@149.606,56.261 ; v1@90.275,43.71 cw(c91.142,42.843) 91.142,44.069 cw(c91.142,45.295) v1@90.275,44.428 ; PB3.1@149.165,55.82 cw(c148.102,54.757) 149.606,54.757 cw(c151.11,54.757) PB3.1@150.047,55.82 ; PB3.1@149.345,56 cw(c148.715,55.37) 149.606,55.37 cw(c150.497,55.37) PB3.1@149.867,56
  Bottom Layer w0.254: U10.2@89.475,52.899 cw(c88.412,51.836) 89.916,51.836 cw(c91.42,51.836) U10.2@90.357,52.899 ; v1@89.557,44.428 ccw(c88.69,45.295) 89.916,45.295 ccw(c91.142,45.295) v1@90.275,44.428 ; U10.2@89.655,53.079 cw(c89.025,52.449) 89.916,52.449 cw(c90.807,52.449) U10.2@90.177,53.079 ; v1(89.916,44.069) U10.2@89.916,53.34
NetPC0_1: PC0.1 U3.2 | length 115.2
  Top Layer w0.254: U3.2@89.916,90.678 93.98,90.678 95.25,91.948 v1(103.251,91.948) 105.156,90.043 113.582,90.043 115.233,88.392 v1(120.142,88.392) ; U3.2@90.177,90.417 cw(c90.807,89.787) 90.807,90.678 cw(c90.807,91.569) U3.2@90.177,90.939 ; U3.2@90.357,90.237 cw(c91.42,89.174) 91.42,90.678 cw(c91.42,92.182) U3.2@90.357,91.119 ; v1@102.892,91.589 ccw(c102.025,90.722) 102.025,91.948 ccw(c102.025,93.174) v1@102.892,92.307 ; v1@103.251,91.44 cw(c103.251,90.214) 104.118,91.081 cw(c104.985,91.948) v1@103.759,91.948 ; v1(116.332,102.616) 126.111,102.616 126.746,101.981 v1(149.606,101.981) ; v1@116.691,102.257 cw(c117.558,101.39) 117.558,102.616 cw(c117.558,103.842) v1@116.691,102.975 ; v1@119.783,88.033 ccw(c118.916,87.166) 118.916,88.392 ccw(c118.916,89.618) v1@119.783,88.751 ; v1@149.247,101.622 ccw(c148.38,100.755) 148.38,101.981 ccw(c148.38,103.207) v1@149.247,102.34
  Bottom Layer w0.254: v1@115.973,102.257 cw(c115.106,101.39) 116.332,101.39 cw(c117.558,101.39) v1@116.691,102.257 ; v1(116.332,102.616) 116.332,96.647 117.221,95.758 118.999,95.758 120.142,94.615 v1(120.142,88.392) ; v1@119.783,88.751 ccw(c118.916,89.618) 120.142,89.618 ccw(c121.368,89.618) v1@120.501,88.751 ; PC0.1@149.165,92.77 ccw(c148.102,93.833) 149.606,93.833 ccw(c151.11,93.833) PC0.1@150.047,92.77 ; v1@149.247,101.622 cw(c148.38,100.755) 149.606,100.755 cw(c150.832,100.755) v1@149.965,101.622 ; PC0.1@149.345,92.59 ccw(c148.715,93.22) 149.606,93.22 ccw(c150.497,93.22) PC0.1@149.867,92.59 ; PC0.1@149.606,92.329 v1(149.606,101.981)
NetPC1_1: PC1.1 U4.2 | length 98.7
  Top Layer w0.254: U4.2@89.916,85.598 92.583,85.598 93.853,84.328 102.108,84.328 102.87,83.566 v1(107.315,83.566) ; U4.2@90.177,85.337 cw(c90.807,84.707) 90.807,85.598 cw(c90.807,86.489) U4.2@90.177,85.859 ; U4.2@90.357,85.157 cw(c91.42,84.094) 91.42,85.598 cw(c91.42,87.102) U4.2@90.357,86.039 ; v1@106.956,83.207 ccw(c106.089,82.34) 106.089,83.566 ccw(c106.089,84.792) v1@106.956,83.925 ; v1(107.315,91.44) 112.903,91.44 114.554,89.789 124.079,89.789 124.841,89.027 129.032,89.027 129.413,89.408 v1(132.334,89.408) ; v1@107.674,91.081 cw(c108.541,90.214) 108.541,91.44 cw(c108.541,92.666) v1@107.674,91.799 ; v1@131.975,89.049 ccw(c131.108,88.182) 131.108,89.408 ccw(c131.108,90.634) v1@131.975,89.767 ; v1(132.334,92.202) 136.481,92.202 139.021,89.662 148.717,89.662 149.606,88.773 PC1.1@149.606,86.741 ; v1@132.693,91.843 cw(c133.56,90.976) 133.56,92.202 cw(c133.56,93.428) v1@132.693,92.561 ; PC1.1@149.165,87.182 ccw(c148.102,88.245) 149.606,88.245 ccw(c151.11,88.245) PC1.1@150.047,87.182 ; PC1.1@149.345,87.002 ccw(c148.715,87.632) 149.606,87.632 ccw(c150.497,87.632) PC1.1@149.867,87.002
  Bottom Layer w0.254: v1@106.956,83.925 ccw(c106.089,84.792) 107.315,84.792 ccw(c108.541,84.792) v1@107.674,83.925 ; v1@106.956,91.081 cw(c106.089,90.214) 107.315,90.214 cw(c108.541,90.214) v1@107.674,91.081 ; v1(107.315,83.566) v1(107.315,91.44) ; v1@131.975,89.767 ccw(c131.108,90.634) 132.334,90.634 ccw(c133.56,90.634) v1@132.693,89.767 ; v1@131.975,91.843 cw(c131.108,90.976) 132.334,90.976 cw(c133.56,90.976) v1@132.693,91.843 ; v1(132.334,89.408) v1(132.334,92.202)
NetPC2_1: PC2.1 U5.2 | length 93.8
  Top Layer w0.254: U5.2@89.916,80.518 94.742,80.518 96.012,79.248 v1(109.982,79.248) ; U5.2@90.177,80.257 cw(c90.807,79.627) 90.807,80.518 cw(c90.807,81.409) U5.2@90.177,80.779 ; U5.2@90.357,80.077 cw(c91.42,79.014) 91.42,80.518 cw(c91.42,82.022) U5.2@90.357,80.959 ; v1@109.623,78.889 ccw(c108.756,78.022) 108.756,79.248 ccw(c108.756,80.474) v1@109.623,79.607 ; v1(109.855,83.693) 120.523,83.693 121.666,84.836 128.143,84.836 130.048,82.931 134.493,82.931 138.049,86.487 v1(144.145,86.487) ; v1@110.214,83.334 cw(c111.081,82.467) 111.081,83.693 cw(c111.081,84.919) v1@110.214,84.052 ; v1@143.786,86.128 ccw(c142.919,85.261) 142.919,86.487 ccw(c142.919,87.713) v1@143.786,86.846 ; v1(144.145,82.296) 144.272,82.296 145.05,83.074 ; v1@144.182,82.547 ccw(c144.269,83.14) 144.692,82.716 ; v1@144.219,82.799 ccw(c144.36,83.764) 145.05,83.074 ; v1@144.653,82.296 cw(c145.573,82.296) 144.922,82.946 ; PC2.1@149.482,82.272 ccw(c149.452,82.423) 149.606,82.423 ; PC2.1@149.606,81.661 149.606,82.423 ; PC2.1@149.73,82.272 cw(c149.76,82.423) 149.606,82.423 ; 145.05,83.074 148.955,83.074 149.606,82.423
  Bottom Layer w0.254: v1@109.496,83.334 cw(c108.629,82.467) 109.855,82.467 cw(c111.081,82.467) v1@110.214,83.334 ; v1@109.623,79.607 ccw(c109.062,80.168) 109.855,80.168 ccw(c110.902,80.168) v1@110.162,79.428 ; 109.855,80.781 ccw(c111.515,80.781) v1@110.341,79.607 ; v1(109.855,83.693) 109.855,79.375 v1(109.982,79.248) ; v1@143.786,82.655 ccw(c142.919,83.522) 144.145,83.522 ccw(c145.371,83.522) v1@144.504,82.655 ; v1@143.786,86.128 cw(c142.919,85.261) 144.145,85.261 cw(c145.371,85.261) v1@144.504,86.128 ; v1(144.145,82.296) v1(144.145,86.487)
NetPC3_1: PC3.1 U6.2 | length 74.3
  Top Layer w0.254: U6.2@89.789,75.311 92.583,75.311 93.853,76.581 103.886,76.581 104.648,77.343 120.523,77.343 121.158,76.708 138.684,76.708 140.081,78.105 ; U6.2@90.05,75.05 cw(c90.68,74.42) 90.68,75.311 cw(c90.68,76.202) U6.2@90.05,75.572 ; U6.2@90.23,74.87 cw(c91.293,73.807) 91.293,75.311 cw(c91.293,76.815) U6.2@90.23,75.752 ; v1@140.691,77.8 ccw(c140.081,77.343) 140.081,78.105 ; v1@140.691,78.41 cw(c140.081,78.867) 140.081,78.105 ; v1(141.097,78.105) 140.081,78.105
  Bottom Layer w0.254: v1@141.097,77.597 cw(c141.097,76.371) 141.964,77.238 cw(c142.831,78.105) v1@141.605,78.105 ; v1(141.097,78.105) 144.399,74.803 149.098,74.803 149.606,75.311 ; PC3.1@149.225,76.088 cw(c148.623,75.311) 149.606,75.311 ; PC3.1@149.38,76.289 cw(c149.024,75.829) 149.606,75.829 cw(c150.188,75.829) PC3.1@149.832,76.289 ; PC3.1@149.606,76.581 149.606,75.311 ; PC3.1@149.987,76.088 ccw(c150.589,75.311) 149.606,75.311
NetPD0_1: PD0.1 R3.2 | length 14.1
  Top Layer w0.254: PD0.1@53.661,91.761 cw(c52.598,90.698) 54.102,90.698 cw(c55.606,90.698) PD0.1@54.543,91.761 ; PD0.1@53.841,91.941 cw(c53.211,91.311) 54.102,91.311 cw(c54.993,91.311) PD0.1@54.363,91.941 ; PD0.1@54.102,92.202 54.102,90.551 54.991,89.662 R3.2@58.674,89.662 ; R3.2@58.233,89.221 ccw(c57.17,88.158) 57.17,89.662 ccw(c57.17,91.166) R3.2@58.233,90.103 ; R3.2@58.413,89.401 ccw(c57.783,88.771) 57.783,89.662 ccw(c57.783,90.553) R3.2@58.413,89.923
NetPD1_1: PD1.1 R3.3 | length 12.1
  Top Layer w0.254: PD1.1@54.102,87.122 R3.3@58.674,87.122 ; PD1.1@54.363,86.861 cw(c54.993,86.231) 54.993,87.122 cw(c54.993,88.013) PD1.1@54.363,87.383 ; PD1.1@54.543,86.681 cw(c55.606,85.618) 55.606,87.122 cw(c55.606,88.626) PD1.1@54.543,87.563 ; R3.3@58.233,86.681 ccw(c57.17,85.618) 57.17,87.122 ccw(c57.17,88.626) R3.3@58.233,87.563 ; R3.3@58.413,86.861 ccw(c57.783,86.231) 57.783,87.122 ccw(c57.783,88.013) R3.3@58.413,87.383
NetPD2_1: PD2.1 R3.4 | length 14.1
  Top Layer w0.254: PD2.1@53.661,82.483 ccw(c52.598,83.546) 54.102,83.546 ccw(c55.606,83.546) PD2.1@54.543,82.483 ; PD2.1@53.841,82.303 ccw(c53.211,82.933) 54.102,82.933 ccw(c54.993,82.933) PD2.1@54.363,82.303 ; PD2.1@54.102,82.042 54.102,83.693 54.991,84.582 R3.4@58.674,84.582 ; R3.4@58.233,84.141 ccw(c57.17,83.078) 57.17,84.582 ccw(c57.17,86.086) R3.4@58.233,85.023 ; R3.4@58.413,84.321 ccw(c57.783,83.691) 57.783,84.582 ccw(c57.783,85.473) R3.4@58.413,84.843
NetPD3_1: PD3.1 R3.5 | length 20.7
  Top Layer w0.254: PD3.1@54.102,76.962 v1(56.261,76.962) ; PD3.1@54.363,76.701 cw(c54.993,76.071) 54.993,76.962 cw(c54.993,77.853) PD3.1@54.363,77.223 ; PD3.1@54.543,76.521 cw(c55.606,75.458) 55.606,76.962 cw(c55.606,78.466) PD3.1@54.543,77.403 ; v1@55.902,76.603 ccw(c55.035,75.736) 55.035,76.962 ccw(c55.035,78.188) v1@55.902,77.321
  Bottom Layer w0.254: v1@55.902,77.321 ccw(c55.035,78.188) 56.261,78.188 ccw(c57.487,78.188) v1@56.62,77.321 ; v1(56.261,76.962) 56.261,81.534 56.769,82.042 R3.5@58.674,82.042 ; R3.5@58.233,81.601 ccw(c57.17,80.538) 57.17,82.042 ccw(c57.17,83.546) R3.5@58.233,82.483 ; R3.5@58.413,81.781 ccw(c57.783,81.151) 57.783,82.042 ccw(c57.783,82.933) R3.5@58.413,82.303
NetPD4_1: PD4.1 R3.6 | length 18.2
  Top Layer w0.254: PD4.1@54.102,71.882 v1(56.261,71.882) ; PD4.1@54.363,71.621 cw(c54.993,70.991) 54.993,71.882 cw(c54.993,72.773) PD4.1@54.363,72.143 ; PD4.1@54.543,71.441 cw(c55.606,70.378) 55.606,71.882 cw(c55.606,73.386) PD4.1@54.543,72.323 ; v1@55.902,71.523 ccw(c55.035,70.656) 55.035,71.882 ccw(c55.035,73.108) v1@55.902,72.241
  Bottom Layer w0.254: v1(56.261,71.882) 57.277,72.898 57.277,79.121 57.658,79.502 ; R3.6@58.119,79.219 ccw(c57.658,78.985) 57.658,79.502 ; R3.6@58.119,79.785 cw(c57.658,80.019) 57.658,79.502 ; R3.6@58.674,79.502 57.658,79.502